# Altium PCB dummy.PcbDoc
Units mm, origin at the board's own origin, x right, y up, seen from the top; angles counter-clockwise.
Board outline 43.05 x 27.3 mm, 2 copper layers (Top Layer, Bottom Layer); 53 components, 52 nets, 198 pads, 36 vias.
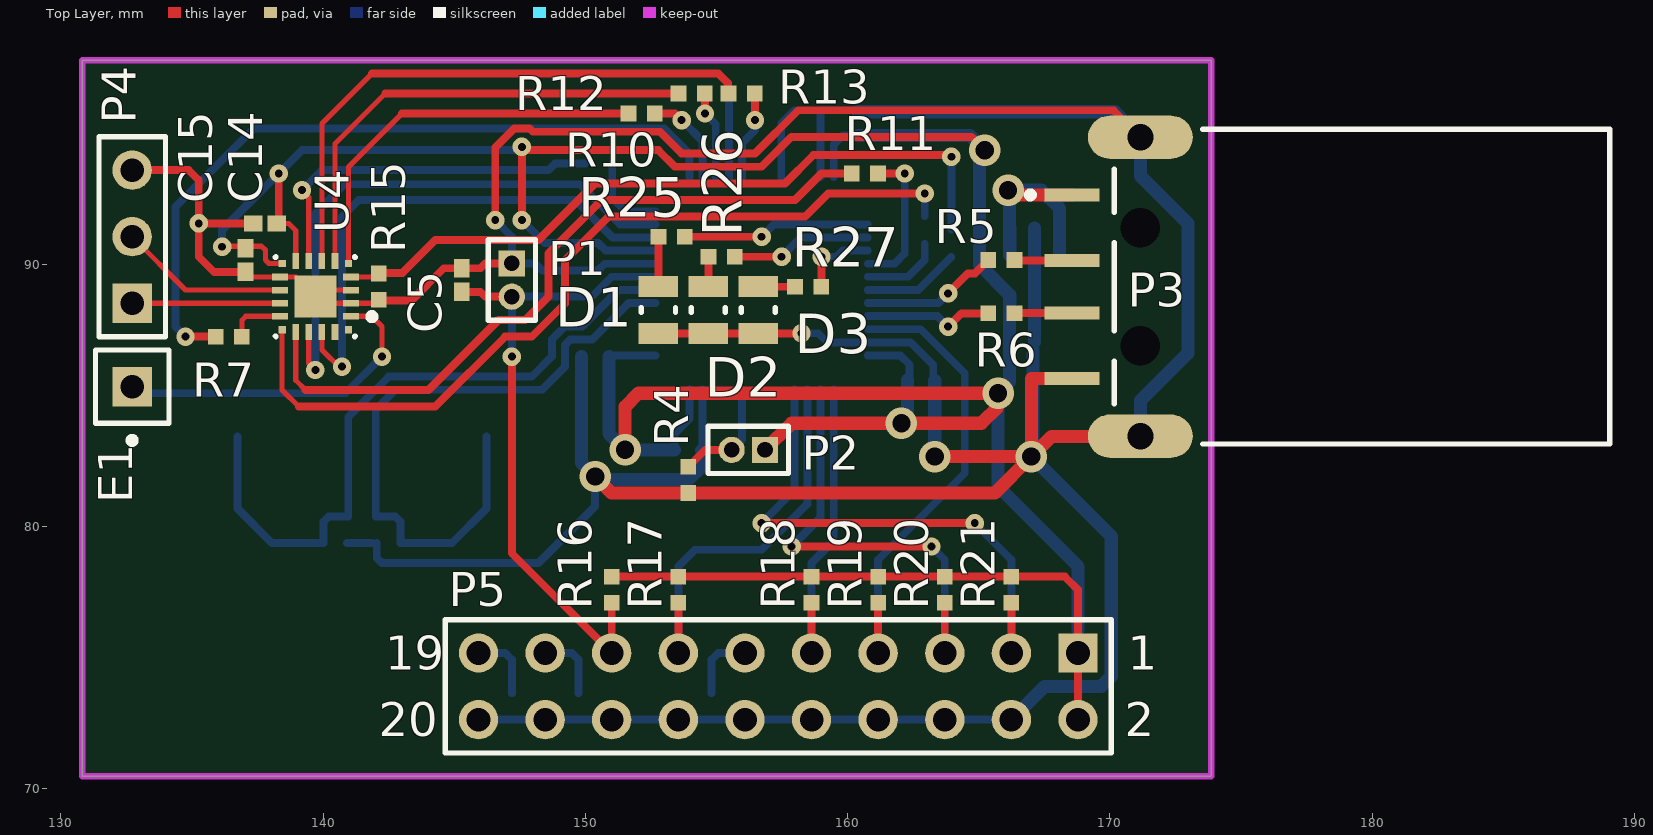
[diagram p0: Top Layer view]
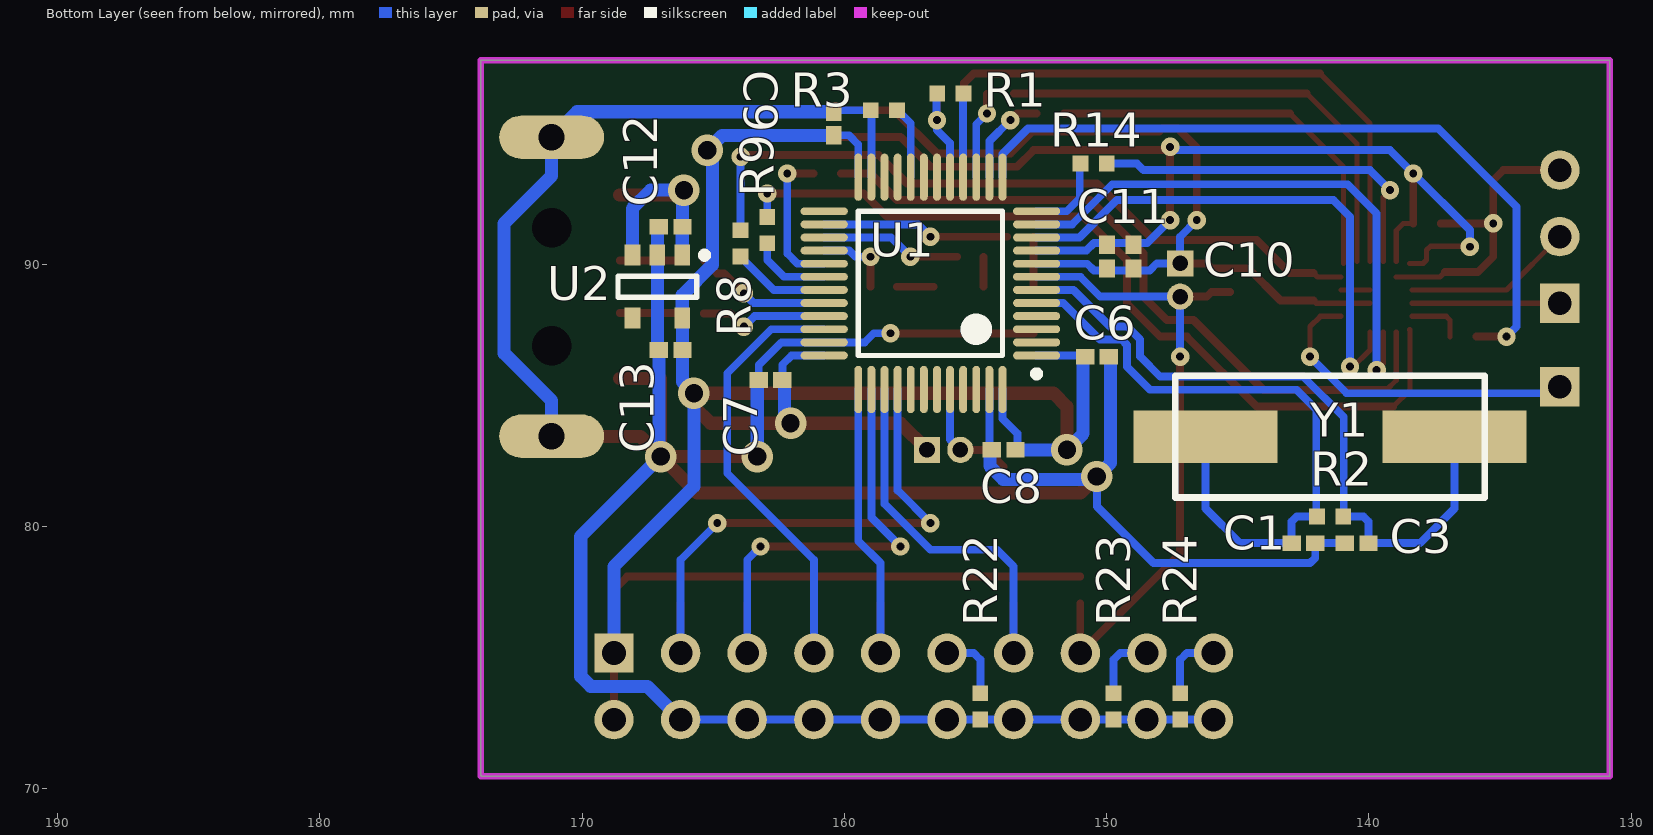
[diagram p1: Bottom Layer view, seen from below]

## Layer stack, top to bottom
Top Layer: signal copper 0.0356
Dielectric: core 0.32, FR-4, Dk 4.8
Bottom Layer: signal copper 0.0356

## Board outline
130.81,70.485 173.863,70.485 173.863,97.79 130.81,97.79

## Design rules (kind name [scope] priority, off if disabled: settings)
Clearance ClearanceForUSB [InPolygon vs InComponent('P3')] p1: gap=0.4
Clearance [All] p2: gap=0.2
DiffPairsRouting [All] p1: maxlimit=0.254 minlimit=0.254 mostfreqgap=0.254 maxuncoupledlength=12.7
HoleSize [All] p1: absolutevalues=TRUE maxlimit=2 minlimit=0.3 maxpercent=80.000 minpercent=20.000
HoleToHoleClearance [All] p1: gap=0.254 allowstackedmicrovias=FALSE
MinimumAnnularRing [All] p1: minimumring=0.2
MinimumSolderMaskSliver [All] p1: minsoldermaskwidth=0.1
PlaneClearance [All] p1: clearance=0.5
PlaneConnect [All] p1: planeconnectstyle=Relief reliefexpansion=0.508 reliefentries=4 reliefconductorwidth=0.3 reliefairgap=0.254
PolygonConnect [All] p1: connectstyle=Relief reliefconductorwidth=0.3 reliefentries=4 polygonreliefangle="90 Angle"
RoutingTopology Top_Horizontal [OnLayer('Top Layer')] p1: topology=Horizontal
RoutingTopology Bottom_Vertical [OnLayer('Bottom Layer')] p2: topology=Vertical
RoutingVias [All] p1: holewidth=0.7 width=1.2 viastyle="Through Hole" minholewidth=0.3 minwidth=0.5 maxholewidth=0.7 maxwidth=1.2
SMDToPlane [All] p1: distance=78740
SilkToSilkClearance [All] p1: silktosilkclearance=0.2
SilkscreenOverComponentPads [All] p1: minsilkscreentomaskgap=0.2
SolderMaskExpansion [All] p1: expansion=0.1
Width [All] p1: maxlimit=0.5 minlimit=0.2 preferedwidth=0.3 minimp=50.000000 maximp=50.000000 favimp=50.000000
19 further rules are at their usual default settings.

## Classes and differential pairs
component class core: C1 C3 C5 C6 C7 C8 C9 C10 C11 D1 D2 D3 P1 P2 R1 R2 R3 R4 R25 R26 R27 U1 Y1
component class hole_field_direct: C14 C15 E1 P4 R7 R8 R9 R10 R11 R12 R13 R14 R15 U4
component class jtag_connector: P5 R16 R17 R18 R19 R20 R21 R22 R23 R24
component class usb_connector: C12 C13 P3 R5 R6 U2
differential pair USB_D: +USB_D_P -USB_D_N

## Components (designator, comment, footprint, x,y, rotation, side; value= is the part's Value field where it differs from the comment)
C1 "27pF" INDC1005L 142.494,79.375 r180 bottom
C3 "27pF" INDC1005L 140.462,79.375 r180 bottom
C5 "100nF" INDC1005L 145.288,89.408 r270 top
C6 "100nF" INDC1005L 150.368,86.487 r0 bottom
C7 "100nF" INDC1005L 162.814,85.598 r180 bottom
C8 "100nF" INDC1005L 153.924,82.931 r180 bottom
C9 "100nF" INDC1005L 160.401,95.377 r270 bottom
C10 "100nF" INDC1005L 148.971,90.297 r270 bottom
C11 "1uF" INDC1005L 149.987,90.297 r270 bottom
C12 "Cap" INDC1005L 166.624,91.44 r180 bottom
C13 "Cap" INDC1005L 166.624,86.741 r180 bottom
C14 "100nF" INDC1005L 137.778,91.567 r180 top
C15 "22nF" INDC1005L 137.033,90.17 r90 top
D1 "LED" LEDC2015X11L 152.781,88.265 r270 top
D2 "LED" LEDC2015X11L 154.686,88.265 r270 top
D3 "LED" LEDC2015X11L 156.591,88.265 r270 top
E1 "Antenna" PIN1 132.715,85.344 r180 top
P1 "Reset pins" MHDR1X2 147.193,90.043 r270 top
P2 "Boot pins" MHDR1X2 156.845,82.931 r180 top
P3 "1470695-2" 1470695A 173.863,89.154 r0 top locked
P4 "Header 3" HDR1X3 132.715,88.519 r90 top
P5 "Header 10X2" HDR2X10 168.783,75.184 r180 top
R1 "47k" RESC1005L 155.956,96.52 r0 bottom
R2 "1M" RESC1005L 141.478,80.391 r0 bottom
R3 "47k" RESC1005L 158.496,95.885 r180 bottom
R4 "47k" RESC1005L 153.924,81.788 r90 top
R5 "22" RESC1005L 165.862,90.17 r0 top
R6 "22" RESC1005L 165.862,88.138 r0 top
R7 "600" RESC1005L 136.398,87.249 r180 top
R8 "2k" RESC1005L 163.957,90.805 r90 bottom
R9 "2k" RESC1005L 162.941,91.313 r270 bottom
R10 "2k" RESC1005L 152.146,95.758 r180 top
R11 "2k" RESC1005L 160.655,93.472 r0 top
R12 "2k" RESC1005L 154.051,96.52 r180 top
R13 "2k" RESC1005L 155.956,96.52 r180 top
R14 "2k" RESC1005L 150.495,93.853 r180 bottom
R15 "47k" RESC1005L 142.113,89.154 r90 top
R16 "10K" RESC1005L 151.003,77.597 r90 top
R17 "10K" RESC1005L 153.543,77.597 r90 top
R18 "10K" RESC1005L 158.623,77.597 r90 top
R19 "10K" RESC1005L 161.163,77.597 r90 top
R20 "10K" RESC1005L 163.703,77.597 r90 top
R21 "10K" RESC1005L 166.243,77.597 r90 top
R22 "10K" RESC1005L 154.813,73.152 r90 bottom
R23 "10K" RESC1005L 149.733,73.152 r90 bottom
R24 "10K" RESC1005L 147.193,73.152 r90 bottom
R25 "56" RESC1005L 153.289,91.059 r180 top
R26 "56" RESC1005L 155.194,90.297 r0 top
R27 "56" RESC1005L 158.496,89.154 r0 top
U1 "STM32F103C8T6" LQFP48_N 156.718,89.281 r0 bottom locked
U2 "ADP120" SOT95P280X110-5L 167.132,89.154 r270 bottom
U4 "Si4705" QFN50P300X300X60-20N 139.7,88.773 r180 top
Y1 "8Mhz" HC-49-SMD 141.478,83.439 r0 bottom

## Footprints (in the part's own frame and the unit in brackets; to place one, negate y for a bottom-side part, rotate by r counter-clockwise, add the part's x,y. Pads: shape width x height; smd on the part's side, far side on the other; paste and mask are expansions set on the pad)
1470695A [mm] "Connector; USB1.1, Type A, SM; 4 Position; Right Angle"
  rect 2.1x0.5 smd: 1(-5.3,3.5) 2(-5.3,1) 3(-5.3,-1) 4(-5.3,-3.5)
  oval 4x1.65 hole 1: 5(-2.7,-5.7) 6(-2.7,5.7)
  round 1.2 hole 1.5 unplated: MH1(-2.7,-2.25) MH2(-2.7,2.25)
  silkscreen extent -7.02,-6 15.2,6
HC-49-SMD [mm]
  rect 5.5x2 smd: 1(-4.75,0) 2(4.75,0)
  silkscreen extent -5.9,-2.33 5.9,2.33
HDR1X3 [mm] "Connector; Header; 3 Position"
  rect 1.5x1.5 hole 0.9: 1(0,0)
  round 1.5 hole 0.9: 2(2.54,0) 3(5.08,0)
  silkscreen extent -1.27,-1.27 6.35,1.27
HDR2X10 [mm] "Connector; Header; 10x2 Position"
  rect 1.5x1.5 hole 0.9: 1(0,0)
  round 1.5 hole 0.9: 2(0,2.54) 3(2.54,0) 4(2.54,2.54) 5(5.08,0) 6(5.08,2.54) 7(7.62,0) 8(7.62,2.54) 9(10.16,0) 10(10.16,2.54) 11(12.7,0) 12(12.7,2.54) 13(15.24,0) 14(15.24,2.54) 15(17.78,0) 16(17.78,2.54) 17(20.32,0) 18(20.32,2.54) 19(22.86,0) 20(22.86,2.54)
  silkscreen extent -1.27,-1.27 24.13,3.81
INDC1005L [mm] "Chip Inductor, Body 1.0x0.5mm, IPC High Density"
  rect 0.7x0.6 smd: 1(-0.45,0) 2(0.45,0)
  body extent -0.55,-0.35 0.55,0.35, height 0.6
LEDC2015X11L [mm] "Chip Led, 2-Leads, Body 2,0x1,5mm, IPC High Density"
  rect 0.8x1.5 smd: 1(-0.9,0) 2(0.9,0)
  silkscreen extent -0.1,-0.65 0.1,0.65, body extent -1,-0.75 1,0.75, height 1.1
LQFP48_N [mm] "Thin QFP, 48-Leads, Body 7x7mm, Pitch 0.5mm, IPC Medium Density"
  oval 1.8x0.3 smd: 1(-4.05,2.75) 2(-4.05,2.25) 3(-4.05,1.75) 4(-4.05,1.25) 5(-4.05,0.75) 6(-4.05,0.25) 7(-4.05,-0.25) 8(-4.05,-0.75) 9(-4.05,-1.25) 10(-4.05,-1.75) 11(-4.05,-2.25) 12(-4.05,-2.75) 25(4.05,-2.75) 26(4.05,-2.25) 27(4.05,-1.75) 28(4.05,-1.25) 29(4.05,-0.75) 30(4.05,-0.25) 31(4.05,0.25) 32(4.05,0.75) 33(4.05,1.25) 34(4.05,1.75) 35(4.05,2.25) 36(4.05,2.75)
  oval 0.3x1.8 smd: 13(-2.75,-4.05) 14(-2.25,-4.05) 15(-1.75,-4.05) 16(-1.25,-4.05) 17(-0.75,-4.05) 18(-0.25,-4.05) 19(0.25,-4.05) 20(0.75,-4.05) 21(1.25,-4.05) 22(1.75,-4.05) 23(2.25,-4.05) 24(2.75,-4.05) 37(2.75,4.05) 38(2.25,4.05) 39(1.75,4.05) 40(1.25,4.05) 41(0.75,4.05) 42(0.25,4.05) 43(-0.25,4.05) 44(-0.75,4.05) 45(-1.25,4.05) 46(-1.75,4.05) 47(-2.25,4.05) 48(-2.75,4.05)
  silkscreen extent -4.17,-2.75 2.75,3.57, body extent -3.5,-3.5 3.5,3.5, height 1.6
MHDR1X2 [mm] "Connector; Header; 2 Position"
  rect 1x1 hole 0.6: 1(0,0)
  round 1 hole 0.6: 2(1.27,0)
  silkscreen extent -0.9,-0.9 2.17,0.9
PIN1 [mm] "Generic Antenna; 1 Lead"
  rect 1.5x1.5 hole 0.9: 1(0,0)
  silkscreen extent -1.4,-1.4 1.4,2.17
QFN50P300X300X60-20N [mm] "QFN, 20-Leads, Body 3,0x3,0mm (max), Pitch 0,50mm, IPC Medium Density"
  rect 1.6x1.6 smd: 0(0,0)
  rect 0.28x0.28 smd: 1(-1.265,1.265) 6(-1.265,-1.265) 11(1.265,-1.265) 16(1.265,1.265)
  rect 0.61x0.25 smd: 2(-1.355,0.75) 3(-1.355,0.25) 4(-1.355,-0.25) 5(-1.355,-0.75) 12(1.355,-0.75) 13(1.355,-0.25) 14(1.355,0.25) 15(1.355,0.75)
  rect 0.25x0.61 smd: 7(-0.75,-1.355) 8(-0.25,-1.355) 9(0.25,-1.355) 10(0.75,-1.355) 17(0.75,1.355) 18(0.25,1.355) 19(-0.25,1.355) 20(-0.75,1.355)
  silkscreen extent -2.28,-1.53 1.53,1.53, body extent -1.5,-1.5 1.5,1.5, height 0.6
RESC1005L [mm] "Chip Resistor, Body 1.1x0.5mm, IPC High Density"
  rect 0.6x0.6 smd: 1(-0.5,0) 2(0.5,0)
  body extent -0.55,-0.3 0.55,0.3, height 0.4
SOT95P280X110-5L [mm] "SOT23, 5-Leads, Body 3,0x2,8mm (max), Pitch 0,95mm, IPC High Density"
  rect 0.8x0.6 smd: 1(-1.2,0.95) 2(-1.2,0) 3(-1.2,-0.95) 4(1.2,-0.95) 5(1.2,0.95)
  silkscreen extent -1.32,-1.5 0.4,1.92, body extent -0.85,-1.5 0.85,1.5, height 1.1

## Part data
C1 C3 C5 C6 C7 C8 C9 C10 C11 C14 C15: library part Cap, "Capacitor"
C12 C13: "Capacitor"
D1 D2 D3: "Typical RED, GREEN, YELLOW, AMBER GaAs LED"
E1: "Generic Antenna"
P1 P2: library part MHDR1X2, "Header, 2-Pin"
P3: "USB 1.1, Right Angle, SMT, A Type, Plug, 4 Position, Natural"
P4: "Header, 3-Pin"
P5: "Header, 10-Pin, Dual row"
R1 R2 R3 R4 R5 R6 R7 R8 R9 R10 R11 R12 R13 R14 R15 R16 R17 R18 R19 R20 R21 R22 R23 R24 R25 R26 R27: library part Res1, "Resistor"
U1: "STM32 ARM-based 32-bit MCU with 64 Kbytes Flash, 48-pin LQFP, Industrial Temperature"
Y1: library part HC-49-SMD

## Via types
v1: diameter 0.7, hole 0.3, Top Layer to Bottom Layer, 28 vias
v2: diameter 1.2, hole 0.7, Top Layer to Bottom Layer, 8 vias

## Nets (pads, with @x,y where several pads share a name; then routed paths per layer and width w, separated by ;. In a path a pad name is that pad's centre, name@x,y a point inside that pad or via, vN(x,y) a via of type N, cw(c..) or ccw(c..) an arc to the next point about the centre after c; other vN are vias at no path point)
+3.3V: C6.2 C7.2 C8.2 C9.2 C10.1 C11.1 C13.2 C14.1 C15.2 P2.1 P5.1 P5.2 R16.2 R17.2 R18.2 R19.2 R20.2 R21.2 U1.1 U1.9 U1.24 U1.36 U1.48 U2.5 U4.10 U4.11 | length 138.5
  Top Layer w0.2: v1@136.161,90.695 137.651,90.695 137.795,90.551 137.795,90.17 137.927,90.038 U4.11 ; C14.1@138.303,91.567 138.684,91.567 138.95,91.301 U4.10
  Top Layer w0.3: C14.1@138.303,91.567 v1(138.303,93.472) v1@138.43,93.345 ; v1(147.574,91.694) v1(147.574,94.488) ; v1@147.574,94.361 152.781,94.361 153.416,93.726 156.718,93.726 157.861,94.869 164.719,94.869 v2(165.227,94.361) ; R16.2 R17.2 R18.2 R19.2 R20.2 R21.2 168.283,78.097 168.783,77.597 P5.1 P5.2
  Top Layer w0.5: v2(151.511,82.931) 151.511,84.582 152.019,85.09 v2@165.608,85.09 ; P2.1 157.861,83.947 v2(162.052,83.947) 165.1,83.947 165.735,84.582 v2(165.735,85.09)
  Bottom Layer w0.3: v1(136.144,90.678) 136.144,91.313 v1(138.303,93.472) 139.192,94.361 147.574,94.361 v1(147.574,94.488) ; v1(147.574,91.694) 148.446,90.822 150.478,90.822 150.769,90.531 U1.9 ; C6.2@150.903,86.531 U1.1 ; C8.2@153.399,82.931 153.399,83.549 153.968,84.118 U1.48 ; U1.24 159.468,94.571 159.824,94.927 C9.2 ; U1.36 162.008,86.531 162.364,86.175 C7.2
  Bottom Layer w0.5: C6.2@150.893,86.487 150.893,83.549 v2(151.511,82.931) C8.2@153.399,82.931 ; C9.2 164.661,94.927 v2(165.227,94.361) ; v2(162.052,83.947) 162.289,84.184 C7.2@162.289,85.598 ; v2@165.031,94.165 165.031,89.985 166.182,88.834 U2.5 ; U2.5@166.174,87.954 166.174,85.529 v2(165.735,85.09) 165.735,81.534 168.783,78.486 P5.1
+5V: C12.2 P3.1 U2.1 U2.3 | length 9
  Top Layer w0.5: v2(166.116,92.837) 166.299,92.654 P3.1
  Bottom Layer w0.5: v2(166.116,92.837) 167.386,92.837 168.082,92.141 U2.3 ; C12.2 v2@166.174,92.779 ; U2.1 C12.2@166.182,91.432
BOOT0: P2.2 R4.2 U1.44 | length 4.4
  Top Layer w0.3: R4.2 154.567,82.931 P2.2
  Bottom Layer w0.3: P2.2 155.968,83.324 U1.44
BOOT1: R3.2 U1.20 | length 2.8
  Bottom Layer w0.3: U1.20 157.468,95.382 R3.2@157.971,95.885
C_AUX1: U1.45
C_AUX2: U1.46
C_AUX3: U1.21
C_AUX4: U1.22
C_RF_DCLK: R11.2 U1.29 | length 5.5
  Top Layer w0.3: R11.2@161.18,93.472 v1(162.179,93.472)
  Bottom Layer w0.3: U1.29 161.786,90.031 162.179,90.424 v1@162.179,93.345
C_RF_DFS: R9.2 U1.30 | length 3.1
  Bottom Layer w0.3: U1.30 162.302,89.531 162.941,90.17 R9.2@162.941,90.788
C_RF_DOUT: R7.2 U1.13 | length 28.4
  Top Layer w0.3: v1(134.747,87.249) R7.2
  Bottom Layer w0.3: v1(134.747,87.249) 134.366,87.63 134.366,92.202 137.352,95.188 152.993,95.188 153.968,94.213 U1.13
C_RF_GPO1: U1.10 U4.19 | length 20.3
  Top Layer w0.2: U4.19 139.95,86.745 v1@140.653,86.042 ; v1(140.716,86.106) v1@140.716,86.233
  Bottom Layer w0.3: v1(140.716,86.106) 140.716,91.821 141.351,92.456 149.606,92.456 151.031,91.031 U1.10
C_RF_GPO2: U1.11 U4.18 | length 21.6
  Top Layer w0.2: U4.18 139.45,86.229 v1(139.7,85.979)
  Bottom Layer w0.3: v1(139.7,85.979) 139.7,91.948 140.813,93.061 149.78,93.061 151.31,91.531 U1.11
C_RF_RCLK: R14.1 U1.12 | length 4.2
  Bottom Layer w0.3: R14.1@151.02,93.853 151.02,92.528 151.517,92.031 U1.12 151.682,92.031
C_RF_RESET: R8.1 U1.31 | length 3.7
  Bottom Layer w0.3: U1.31 162.691,89.031 R8.1@163.948,90.288
C_RF_SCLK: R12.1 U1.15 | length 3.3
  Top Layer w0.3: v1(154.559,95.758) R12.1@154.559,96.503
  Bottom Layer w0.3: v1(154.559,95.758) 154.968,95.349 U1.15
C_RF_SDIO: R1.2 R13.1 U1.17 | length 4.4
  Top Layer w0.3: v1(156.464,95.504) R13.1@156.464,96.503
  Bottom Layer w0.3: U1.17 155.968,94.627 156.464,95.123 v1(156.464,95.504) ; v1@156.481,95.521 R1.2@156.481,96.52
C_RF_SS: R10.1 U1.14 | length 3.6
  Top Layer w0.3: R10.1@152.671,95.758 153.416,95.758 v1(153.67,95.504)
  Bottom Layer w0.3: v1(153.67,95.504) 154.468,94.706 U1.14
GND: C1.2 C3.1 C5.1 C6.1 C7.1 C8.1 C9.1 C10.2 C11.2 C12.1 C13.1 C14.2 C15.1 D1.2 D2.2 D3.2 P1.1 P3.4 P3.5 P3.6 P4.3 P5.4 P5.6 P5.8 P5.10 P5.12 P5.14 P5.16 P5.18 P5.20 R3.1 R4.1 R15.1 R22.1 R23.1 R24.1 U1.8 U1.23 U1.35 U1.47 U2.2 U4.0 U4.3 U4.4 U4.12 | length 196.7
  Top Layer w0.2: C15.1@137.033,89.772 137.096,89.708 137.282,89.523 U4.12 U4.0@138.95,89.523 ; U4.0@139.95,88.523 U4.3 142.007,88.523 R15.1@142.113,88.629 ; U4.0@139.95,89.023 U4.4
  Top Layer w0.3: P4.3 134.874,93.599 135.255,93.218 v1(135.255,91.567) ; C15.1@137.096,89.708 135.844,89.708 135.255,90.297 135.255,91.313 135.509,91.567 C14.2@137.253,91.567 ; R15.1@142.113,88.629 143.366,88.629 144.595,89.858 C5.1 145.992,89.858 146.177,90.043 P1.1 ; v1(146.558,91.694) 146.558,94.462 147.284,95.188 147.864,95.188 147.991,95.061 152.843,95.061 153.67,94.234 156.464,94.234 158.115,95.885 170.132,95.885 P3.6 ; D1.2 D2.2 D3.2 v1@158.231,87.365
  Top Layer w0.5: v2(150.368,81.915) 151.003,81.28 165.608,81.28 v2(167.005,82.677) ; v2(163.322,82.677) v2(167.005,82.677) ; P3.4 167.005,85.654 v2(167.005,82.677) ; P3.5 171.148,83.439 167.767,83.439 v2(167.005,82.677)
  Bottom Layer w0.3: C3.1 C1.2@141.842,79.375 ; C1.2 142.044,78.809 142.24,78.613 148.209,78.613 150.368,80.772 v2(150.368,81.915) ; P5.20 P5.18 P5.16 P5.14 P5.12 P5.10 P5.8 P5.6 P5.4 ; v1(146.558,91.694) 147.193,91.059 P1.1 148.082,90.043 148.353,89.772 150.478,89.772 150.737,90.031 U1.8 ; C8.1@154.322,82.931 154.468,83.077 U1.47 ; v1(158.242,87.376) 158.877,87.376 159.222,87.031 U1.35 162.397,87.031 163.264,86.164 C7.1 ; U1.23 R3.1@158.968,95.885 ; R3.1@159.021,95.885 C9.1@160.384,95.885
  Bottom Layer w0.5: C6.1@149.843,86.487 149.843,82.44 v2(150.368,81.915) 150.478,81.805 153.941,81.805 154.449,82.313 C8.1@154.449,82.931 ; C9.1 170.19,95.827 P3.6 171.163,93.378 172.974,91.567 172.974,86.614 171.163,84.803 P3.5 ; v2(163.322,82.677) C7.1@163.322,85.581 ; P5.4 167.513,73.914 169.672,73.914 170.053,74.295 170.053,79.629 v2@167.074,82.608 ; v2@167.074,82.746 C13.1 ; 167.132,87.053 U2.2 C12.1@167.132,91.382
NetD1_1: D1.1 R25.2 | length 1.9
  Top Layer w0.3: D1.1 R25.2@152.781,91.051
NetD2_1: D2.1 R26.1 | length 1.1
  Top Layer w0.3: D2.1 R26.1@154.686,90.289
NetD3_1: D3.1 R27.1 | length 1.4
  Top Layer w0.3: D3.1@156.602,89.154 R27.1
NetE1_1: E1.1 U4.2 | length 12.7
  Top Layer w0.2: U4.2 141.847,88.023 142.24,87.63 v1(142.24,86.487)
  Bottom Layer w0.3: E1.1 132.969,85.09 140.843,85.09 v1(142.24,86.487)
NetP3_2: P3.2 R5.2 | length 2.2
  Top Layer w0.3: R5.2@166.378,90.154 P3.2
NetP3_3: P3.3 R6.2 | length 2.2
  Top Layer w0.3: R6.2@166.378,88.154 P3.3
NetP4_1: P4.1 U4.14 | length 5.6
  Top Layer w0.2: P4.1@132.715,88.523 U4.14
NetP4_2: P4.2 U4.13 | length 6.5
  Top Layer w0.2: P4.2 134.751,89.023 U4.13
NetP5_11: P5.11 R22.2 | length 2.7
  Bottom Layer w0.3: R22.2 154.813,74.93 155.067,75.184 P5.11
NetP5_17: P5.17 R23.2 | length 2.7
  Bottom Layer w0.3: P5.17 149.479,75.184 149.733,74.93 R23.2
NetP5_19: P5.19 R24.2 | length 2.7
  Bottom Layer w0.3: P5.19 146.939,75.184 147.193,74.93 R24.2
NetR1_1: R1.1 U1.16 | length 3.2
  Bottom Layer w0.3: U1.16 R1.1@155.468,96.483
NetR7_1: R7.1 U4.15 | length 2.1
  Top Layer w0.2: R7.1 136.898,87.876 137.045,88.023 U4.15
NetR9_1: R9.1 U4.16 | length 32.3
  Top Layer w0.2: U4.16 138.43,87.503 138.43,85.217 139.065,84.582
  Top Layer w0.3: 139.065,84.582 144.272,84.582 146.939,87.249 147.955,87.249 149.225,88.519 149.225,90.17 150.884,91.829 158.377,91.829 159.258,92.71 v1(162.941,92.71)
  Bottom Layer w0.3: R9.1@162.941,91.838 v1(162.941,92.71)
NetR10_2: R10.2 U4.6 | length 15.2
  Top Layer w0.2: U4.6 140.965,93.721 143.002,95.758
  Top Layer w0.3: 143.002,95.758 R10.2@151.621,95.758
NetR11_1: R11.1 U4.17 | length 27.6
  Top Layer w0.2: U4.17 138.95,85.586 139.319,85.217
  Top Layer w0.3: 139.319,85.217 144.018,85.217 146.685,87.884 147.701,87.884 148.59,88.773 148.59,90.424 150.622,92.456 157.988,92.456 159.004,93.472 R11.1@160.13,93.472
NetR12_2: R12.2 U4.7 | length 18.3
  Top Layer w0.2: U4.7 140.45,94.603 142.367,96.52
  Top Layer w0.3: 142.367,96.52 R12.2@153.526,96.52
NetR13_2: R13.2 U4.8 | length 22.1
  Top Layer w0.2: U4.8 139.95,95.373 141.859,97.282
  Top Layer w0.3: 141.859,97.282 155.067,97.282 155.431,96.918 R13.2@155.431,96.52
NetR14_2: R14.2 U4.9 | length 14
  Top Layer w0.2: v1(139.192,92.837) 139.45,92.579 U4.9
  Bottom Layer w0.3: v1(139.192,92.837) 139.954,93.599 148.59,93.599 148.844,93.853 R14.2
NetR25_1: R25.1 U1.26 | length 7.2
  Top Layer w0.3: R25.1 v1(156.718,91.059)
  Bottom Layer w0.3: v1(156.718,91.059) 157.19,91.531 U1.26
NetR26_2: R26.2 U1.27 | length 5.4
  Top Layer w0.3: R26.2 v1(157.48,90.297)
  Bottom Layer w0.3: v1(157.48,90.297) 158.214,91.031 U1.27
NetR27_2: R27.2 U1.28 | length 3
  Top Layer w0.3: R27.2 v1@158.996,90.289
  Bottom Layer w0.3: v1(159.004,90.297) 159.577,90.297 159.811,90.531 U1.28
OSC_IN: C1.1 R2.2 U1.5 Y1.2 | length 25.3
  Bottom Layer w0.3: Y1.2 146.228,80.696 144.907,79.375 C1.1 142.944,80.195 142.748,80.391 142.003,80.391 142.003,84.472 142.756,85.225 148.344,85.225 149.218,86.099 149.218,86.932 149.423,87.137 150.256,87.137 151.65,88.531 U1.5
OSC_OUT: C3.2 R2.1 U1.6 Y1.1 | length 26.3
  Bottom Layer w0.3: Y1.1 136.728,80.696 138.049,79.375 C3.2 140.012,80.195 140.208,80.391 140.953,80.391 140.953,84.184 142.494,85.725 147.955,85.725 148.718,86.488 148.718,87.139 149.216,87.637 149.867,87.637 151.261,89.031 U1.6
RF_RESET: R8.2 R15.2 U4.5 | length 27.6
  Top Layer w0.2: U4.5 141.957,89.523 R15.2@142.113,89.679
  Top Layer w0.3: R15.2@142.113,89.679 143.019,89.679 144.272,90.932 148.209,90.932 150.368,93.091 157.607,93.091 158.688,94.172 163.892,94.172 v1(163.957,94.107)
  Bottom Layer w0.3: R8.2@163.957,91.33 v1(163.957,94.107)
RST: C5.2 P1.2 P5.15 R16.1 U1.7 | length 24.8
  Top Layer w0.3: C5.2 145.992,88.958 146.177,88.773 P1.2 ; v1(147.193,86.487) 147.193,78.994 P5.15 R16.1@151.003,77.072
  Bottom Layer w0.3: v1(147.193,86.487) P1.2 150.241,88.773 150.999,89.531 U1.7
TCK: P5.9 R18.1 U1.37 | length 12.3
  Top Layer w0.3: P5.9 R18.1@158.623,77.072
  Bottom Layer w0.3: P5.9 158.623,78.613 159.468,79.458 U1.37
TDI: P5.5 R20.1 U1.38 | length 17.9
  Top Layer w0.3: v1(157.861,79.248) v1(163.195,79.248) ; P5.5 R20.1@163.703,77.072
  Bottom Layer w0.3: v1(157.861,79.248) 158.968,80.355 U1.38 ; v1(163.195,79.248) 163.703,78.74 P5.5
TDO: P5.13 R17.1 U1.39 | length 15.5
  Top Layer w0.3: P5.13 R17.1@153.543,77.072
  Bottom Layer w0.3: P5.13 153.543,78.486 154.178,79.121 156.718,79.121 158.468,80.871 U1.39
TMS: P5.7 R19.1 U1.34 | length 18.3
  Top Layer w0.3: P5.7 R19.1@161.163,77.072
  Bottom Layer w0.3: U1.34 162.786,87.531 164.465,85.852 164.465,82.042 161.163,78.74 P5.7
TRST: P5.3 R21.1 U1.40 | length 21.2
  Top Layer w0.3: v1(156.718,80.137) v1(164.846,80.137) ; P5.3 R21.1@166.243,77.072
  Bottom Layer w0.3: v1(156.718,80.137) 157.968,81.387 U1.40 ; v1(164.846,80.137) 166.243,78.74 P5.3
USB_D_N: R5.1 U1.32 | length 5.3
  Top Layer w0.3: v1(163.83,88.9) 164.592,89.662 164.854,89.662 R5.1
  Bottom Layer w0.3: U1.32 163.461,88.531 v1(163.83,88.9)
USB_D_P: R6.1 U1.33 | length 5
  Top Layer w0.3: v1(163.83,87.63) 164.338,88.138 R6.1
  Bottom Layer w0.3: U1.33 163.429,88.031 v1(163.83,87.63)
pads on no net: P3.MH1 P3.MH2 U1.2 U1.3 U1.4 U1.18 U1.19 U1.25 U1.41 U1.42 U1.43 U2.4 U4.1 U4.20

## Polygon pours and split planes (outlines as drawn)
GND on Bottom Layer "Bottom Layer-GND" (solid, shelved, pour order 2): 130.81,97.79 173.863,97.79 173.863,70.485 130.81,70.485
GND on Top Layer "Top Layer-GND" (solid, shelved, pour order 4): 130.81,97.79 173.863,97.79 173.863,70.485 130.81,70.485

## Keep-outs
Keep-Out Layer:
  the board outline again, w0.254

## Silkscreen, mask and mechanical layers (free items; w line width, h text height)
Guide layer:
  lines w0.254: 104.521,52.959 112.395,52.959 ; 104.648,116.967 112.522,116.967 ; 108.458,48.895 108.458,57.277 ; 108.585,112.903 108.585,121.285 ; 193.167,52.959 201.041,52.959 ; 197.104,48.895 197.104,57.277 ; 98.171,42.672 207.264,42.672 207.264,127.889 98.171,127.889 98.171,42.672
Mechanical 13:
  lines w0.254: 130.81,80.518 177.8,80.518

## Dimensions
130.81,70.485 to 173.863,70.485 on Mechanical 1
173.863,97.79 to 189.063,95.154 on Mechanical 1
173.863,70.485 to 189.063,83.154 on Mechanical 1
177.8,80.518 to 189.063,83.154 on Mechanical 13

## Text inside footprints (layer, text, board x,y; h text height)
P3: Mechanical 1 "PCB Edge" at 174.336,83.981 h0.25 r90
P5: Top Overlay "2" at 170.561,72.009 h1.3; Top Overlay "1" at 170.688,74.549 h1.3; Top Overlay "19" at 142.367,74.549 h1.3; Top Overlay "20" at 142.113,72.009 h1.3